# EAGLE board mainboard_v1 (EAGLE 9.4.2)
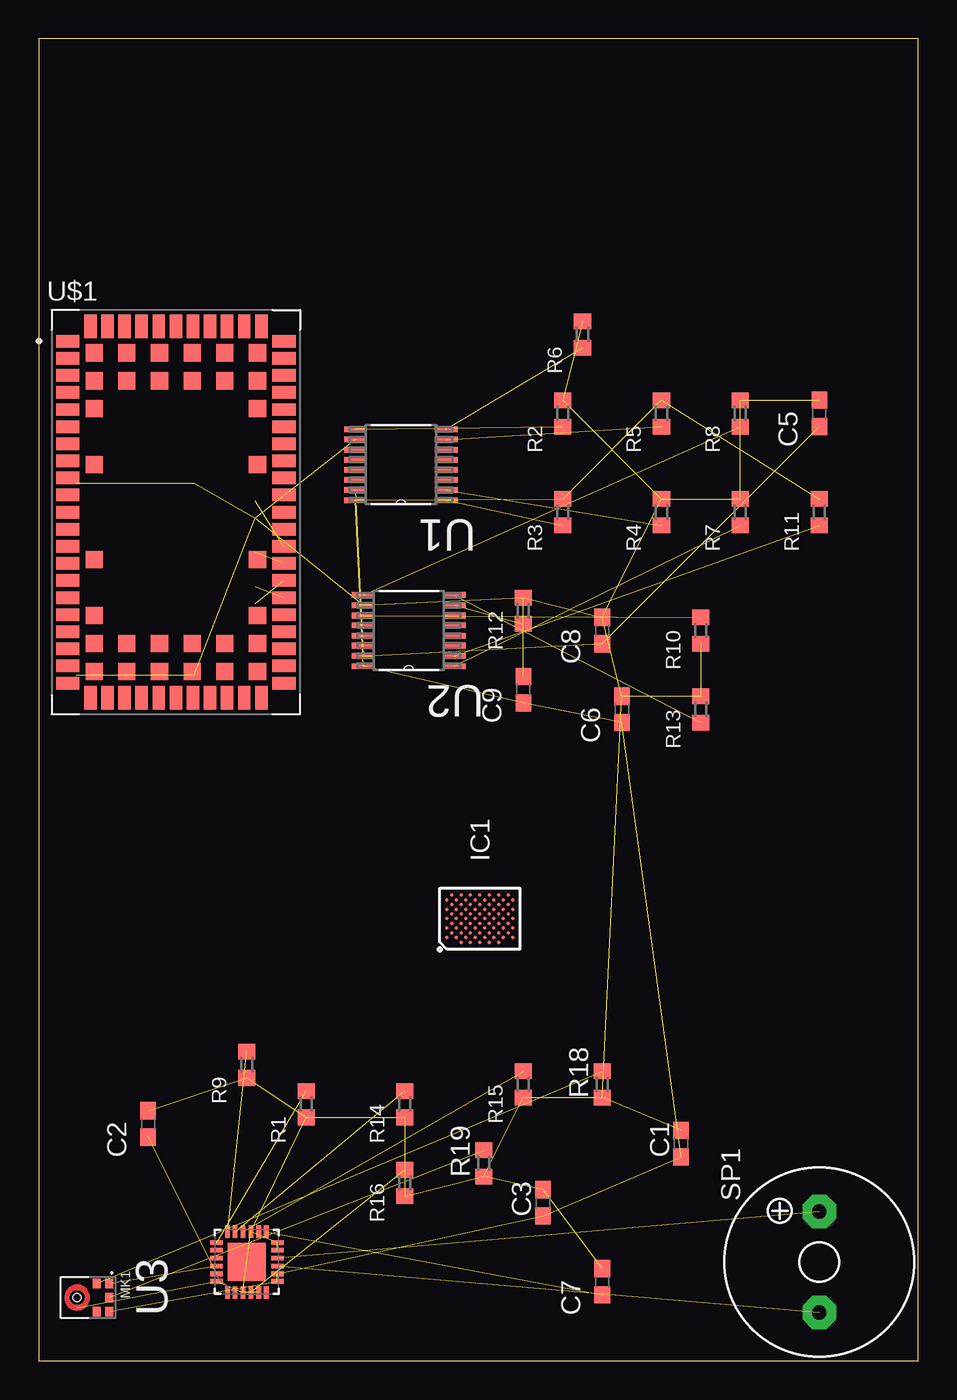
[diagram p0: board, top side]
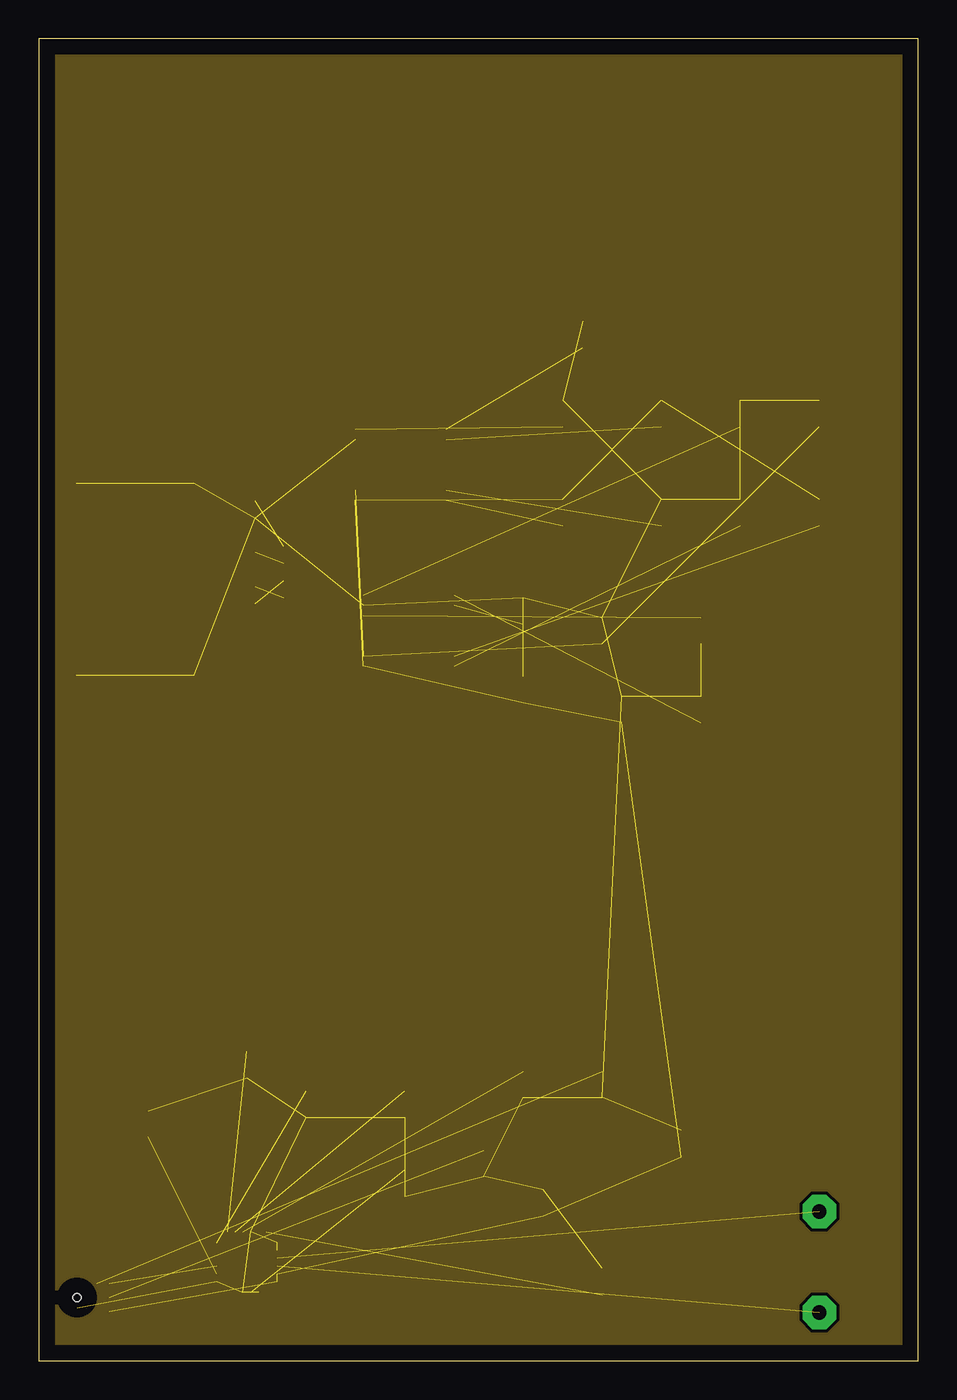
[diagram p1: board, inner layer Route2]
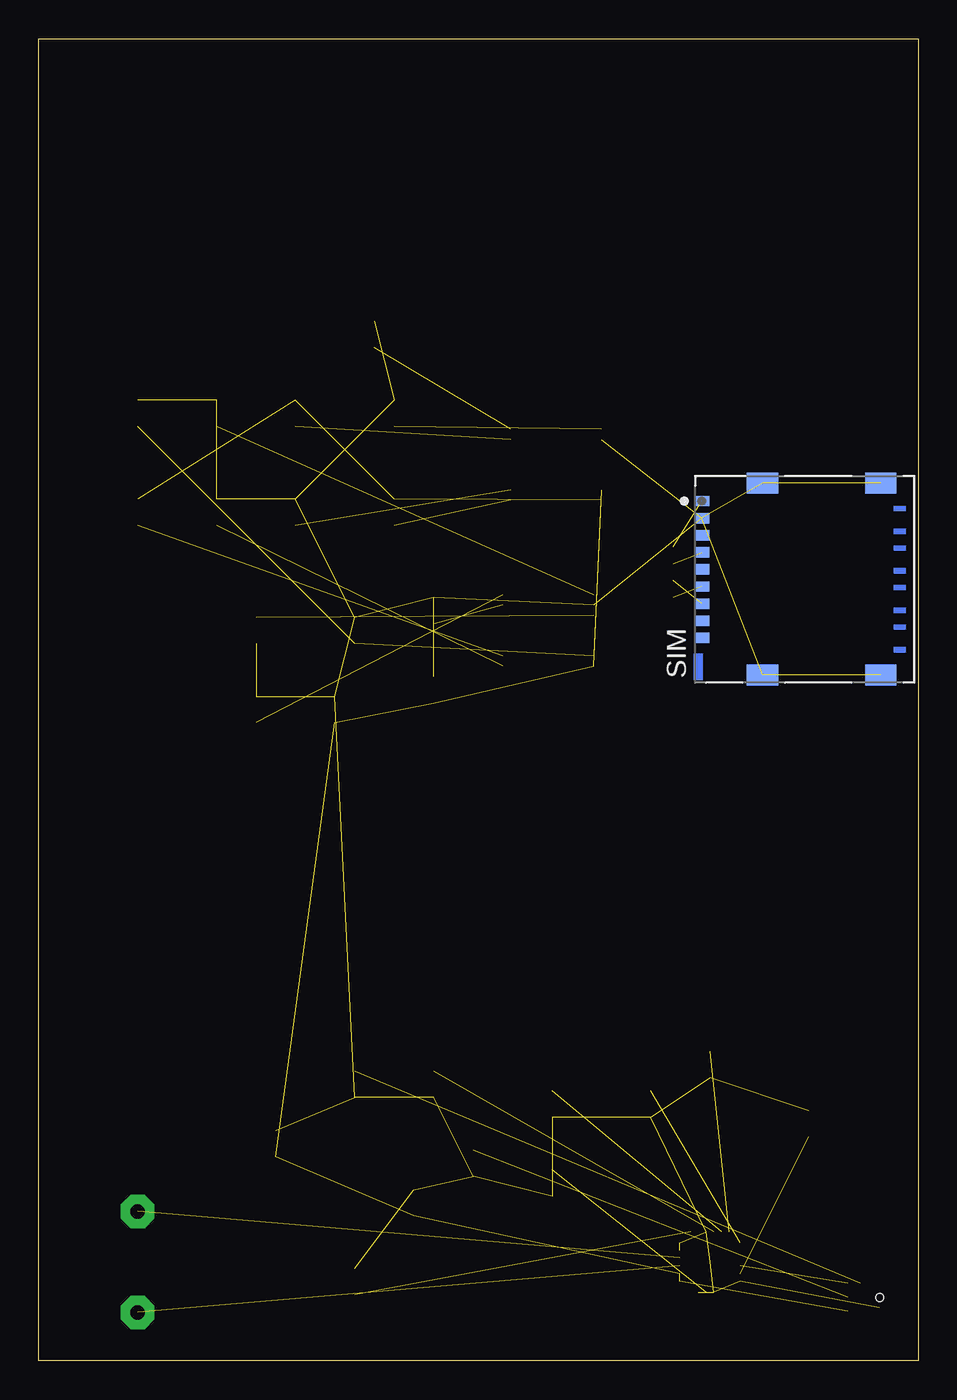
[diagram p2: board, bottom side, seen from below]

Size 56.57 x 85.07 mm. Coordinates in mm from the lower left corner, seen from the top.
Outline: 56.57,0 56.57,85.07 0,85.07 0,0 56.57,0
Copper layers (1+2*15+16): Top 0.035mm / dielectric 1.5mm / Route2 0.035mm / dielectric 0.15mm / Route15 0.035mm / dielectric 0.2mm / Bottom 0.035mm
Design rules "default *": minimum track width 6mil, minimum drill 0.35mm, track to track 6mil, track to pad 6mil, pad to pad 6mil, via to via 6mil, smd to smd 6mil, copper to edge 40mil, drill to drill 6mil, minimum pad ring 10mil, minimum via ring 8mil, stop-mask expansion 4mil, vias tented up to drill 0mil, thermal gap 10mil
Net classes: 0 default: width 0.203 mm, clearance 0.203 mm; 1 GND/voltage: width 0.457 mm, drill 0.152 mm, clearance 0.203 mm

## Footprints (pad centres in the part's own frame; a part is rotated, then mirrored left to right if it is on the bottom)
C0603 = smd 1.1 x 1: 1 -0.85,0; 2 0.85,0
BGA80C30P11X15_368X319X47 = smd 0.215 x 0.215: A2 -1.212,2.121; A4 -0.606,2.121; A6 0,2.121; A8 0.606,2.121; A10 1.212,2.121; B3 -0.909,1.818; B5 -0.303,1.818; B7 0.303,1.818; B9 0.909,1.818; B11 1.515,1.818; C2 -1.212,1.515; C4 -0.606,1.515; C6 0,1.515; C8 0.606,1.515; C10 1.212,1.515; D1 -1.515,1.212; D3 -0.909,1.212; D5 -0.303,1.212; D7 0.303,1.212; D9 0.909,1.212; D11 1.515,1.212; E2 -1.212,0.909; E4 -0.606,0.909; E6 0,0.909; E8 0.606,0.909; E10 1.212,0.909; F1 -1.515,0.606; F3 -0.909,0.606; F5 -0.303,0.606; F7 0.303,0.606; F9 0.909,0.606; F11 1.515,0.606; G2 -1.212,0.303; G4 -0.606,0.303; G6 0,0.303; G8 0.606,0.303; G10 1.212,0.303; H1 -1.515,0; H3 -0.909,0; H5 -0.303,0; H7 0.303,0; H9 0.909,0; H11 1.515,0; J2 -1.212,-0.303; J4 -0.606,-0.303; J6 0,-0.303; J8 0.606,-0.303; J10 1.212,-0.303; K1 -1.515,-0.606; K3 -0.909,-0.606; K5 -0.303,-0.606; K7 0.303,-0.606; K9 0.909,-0.606; K11 1.515,-0.606; L2 -1.212,-0.909; L4 -0.606,-0.909; L6 0,-0.909; L8 0.606,-0.909; L10 1.212,-0.909; M1 -1.515,-1.212; M3 -0.909,-1.212; M5 -0.303,-1.212; M7 0.303,-1.212; M9 0.909,-1.212; M11 1.515,-1.212; N2 -1.212,-1.515; N4 -0.606,-1.515; N6 0,-1.515; N8 0.606,-1.515; N10 1.212,-1.515; P3 -0.909,-1.818; P5 -0.303,-1.818; P7 0.303,-1.818; P9 0.909,-1.818; P11 1.515,-1.818; R2 -1.212,-2.121; R4 -0.606,-2.121; R6 0,-2.121; R8 0.606,-2.121; R10 1.212,-2.121
MIC_SPH0645LM4H-B = smd 0.6 x 0.522: 1 -0.9,2.074; 2 -0.9,1.252; 4 0.9,1.252; 5 0.9,2.074; 6 0,2.074 | smd 0.1 x 0.1: 3 0.65,0.02 | hole 0.5: 0,0
R0603 = smd 1 x 1.1: 1 -0.85,0; 2 0.85,0
TE_2199337-5 = smd 0.67 x 0.95: C1 5.03,6.625; C2 1.73,6.625; C3 -0.47,6.625; C4 -2.67,6.625; C5 3.93,6.625; C6 0.63,6.625; C7 -1.57,6.625; C8 -3.77,6.625; SW 2.83,6.625 | smd 1.35 x 2: G1 -6.175,2.72; G2 6.175,2.72; G3 6.175,-4.9; G4 -6.175,-4.9
KSS1201 = drill 0.914 pad 2.159 octagon: + 3.251,0; - -3.251,0
SOP65P640X120-16N = smd 1.473 x 0.356: 1 -2.921,2.286; 2 -2.921,1.626; 3 -2.921,0.965; 4 -2.921,0.33; 5 -2.921,-0.33; 6 -2.921,-0.965; 7 -2.921,-1.626; 8 -2.921,-2.286; 9 2.921,-2.286; 10 2.921,-1.626; 11 2.921,-0.965; 12 2.921,-0.33; 13 2.921,0.33; 14 2.921,0.965; 15 2.921,1.626; 16 2.921,2.286
QFN50P260X260X100-25N = smd 0.813 x 0.305: 1 -1.956,1.245; 2 -1.956,0.762; 3 -1.956,0.254; 4 -1.956,-0.254; 5 -1.956,-0.762; 6 -1.956,-1.245; 13 1.956,-1.245; 14 1.956,-0.762; 15 1.956,-0.254; 16 1.956,0.254; 17 1.956,0.762; 18 1.956,1.245 | smd 0.305 x 0.813: 7 -1.245,-1.956; 8 -0.762,-1.956; 9 -0.254,-1.956; 10 0.254,-1.956; 11 0.762,-1.956; 12 1.245,-1.956; 19 1.245,1.956; 20 0.762,1.956; 21 0.254,1.956; 22 -0.254,1.956; 23 -0.762,1.956; 24 -1.245,1.956 | smd 2.438 x 2.438: 25 0,0
XCVR_SARA-N200-02B = smd 1.5 x 0.8: 1 -6.95,11; 2 -6.95,9.9; 3 -6.95,8.8; 4 -6.95,7.7; 5 -6.95,6.6; 6 -6.95,5.5; 7 -6.95,4.4; 8 -6.95,3.3; 9 -6.95,2.2; 10 -6.95,1.1; 11 -6.95,0; 12 -6.95,-1.1; 13 -6.95,-2.2; 14 -6.95,-3.3; 15 -6.95,-4.4; 16 -6.95,-5.5; 17 -6.95,-6.6; 18 -6.95,-7.7; 19 -6.95,-8.8; 20 -6.95,-9.9; 21 -6.95,-11; 33 6.95,-11; 34 6.95,-9.9; 35 6.95,-8.8; 36 6.95,-7.7; 37 6.95,-6.6; 38 6.95,-5.5; 39 6.95,-4.4; 40 6.95,-3.3; 41 6.95,-2.2; 42 6.95,-1.1; 43 6.95,0; 44 6.95,1.1; 45 6.95,2.2; 46 6.95,3.3; 47 6.95,4.4; 48 6.95,5.5; 49 6.95,6.6; 50 6.95,7.7; 51 6.95,8.8; 52 6.95,9.9; 53 6.95,11 | smd 0.8 x 1.5: 22 -5.5,-11.95; 23 -4.4,-11.95; 24 -3.3,-11.95; 25 -2.2,-11.95; 26 -1.1,-11.95; 27 0,-11.95; 28 1.1,-11.95; 29 2.2,-11.95; 30 3.3,-11.95; 31 4.4,-11.95; 32 5.5,-11.95; 54 5.5,11.95; 55 4.4,11.95; 56 3.3,11.95; 57 2.2,11.95; 58 1.1,11.95; 59 0,11.95; 60 -1.1,11.95; 61 -2.2,11.95; 62 -3.3,11.95; 63 -4.4,11.95; 64 -5.5,11.95 | smd 1.1 x 1.1: 65 -5.25,10.25; 66 -3.15,10.25; 67 -1.05,10.25; 68 1.05,10.25; 69 3.15,10.25; 70 5.25,10.25; 71 -5.25,8.45; 72 -3.15,8.45; 73 -1.05,8.45; 74 1.05,8.45; 75 3.15,8.45; 76 5.25,8.45; 77 -5.25,6.65; 78 5.25,6.65; 79 -5.25,3.05; 80 5.25,3.05; 81 -5.25,-3.05; 82 5.25,-3.05; 83 -5.25,-6.65; 84 5.25,-6.65; 85 -5.25,-8.45; 86 -3.15,-8.45; 87 -1.05,-8.45; 88 1.05,-8.45; 89 3.15,-8.45; 90 5.25,-8.45; 91 -5.25,-10.25; 92 -3.15,-10.25; 93 -1.05,-10.25; 94 1.05,-10.25; 95 3.15,-10.25; 96 5.25,-10.25

## Placement (x,y rotation side)
C1  200pF  [C0603]  41.33,13.97 90 top
C2  100nF  [C0603]  7.04,15.24 90 top
C3  .1uF  [C0603]  32.44,10.16 90 top
C5  0.01uF  [C0603]  50.22,60.96 90 top
C6  0.01uF  [C0603]  37.52,41.91 90 top
C7  100nF  [C0603]  36.25,5.08 90 top
C8  0.01uF  [C0603]  36.25,46.99 90 top
C9  0.01uF  [C0603]  31.17,43.18 90 top
IC1  CY8C6247FDI-D32T  [BGA80C30P11X15_368X319X47]  28.37,28.45 90 top
MK1  SPH0645LM4H-B  [MIC_SPH0645LM4H-B]  2.46,4.06 270 top
R1  1k  [R0603]  17.2,16.51 90 top
R2  1k  [R0603]  33.71,60.96 90 top
R3  1k  [R0603]  33.71,54.61 90 top
R4  1k  [R0603]  40.06,54.61 90 top
R5  1k  [R0603]  40.06,60.96 90 top
R6  1k  [R0603]  34.98,66.04 90 top
R7  1k  [R0603]  45.14,54.61 90 top
R8  1k  [R0603]  45.14,60.96 90 top
R9  1k  [R0603]  13.39,19.05 90 top
R10  1k  [R0603]  42.6,46.99 90 top
R11  1k  [R0603]  50.22,54.61 90 top
R12  1k  [R0603]  31.17,48.26 90 top
R13  1k  [R0603]  42.6,41.91 90 top
R14  1k  [R0603]  23.55,16.51 90 top
R15  1k  [R0603]  31.17,17.78 90 top
R16  1k  [R0603]  23.55,11.43 90 top
R18  1k  [R0603]  36.25,17.78 90 top
R19  100k  [R0603]  28.63,12.7 90 top
SIM  2199337-5  [TE_2199337-5]  7.29,50.29 90 bottom
SP1  KSS1201  [KSS1201]  50.22,6.35 90 top
U1  SN74AVC4T774PWR  [SOP65P640X120-16N]  23.29,57.66 180 top
U2  SN74AVC4T774PWR  [SOP65P640X120-16N]  23.8,46.99 180 top
U3  TFA9879HN/N1,118  [QFN50P260X260X100-25N]  13.39,6.35 90 top
U$1  SARA-U260  [XCVR_SARA-N200-02B]  8.81,54.61 0 top

## Library data of the parts
C1-C3 C5-C9 R1-R16 R18 R19 = adafruit
IC1 = SamacSys_Parts; DESCRIPTION: ARM Microcontrollers - MCU; HEIGHT: 0.467mm; MANUFACTURER_NAME: Cypress Semiconductor; MANUFACTURER_PART_NUMBER: CY8C6247FDI-D32T; MOUSER_PART_NUMBER: 727-CY8C6247FDI-D32T; MOUSER_PRICE-STOCK: https://www.mouser.com/Search/Refine.aspx?Keyword=727-CY8C6247FDI-D32T
MK1 = SPH0645LM4H-B; DESCRIPTION: Mic Mems Digital I2s Omni -26db; DIGI-KEY_PART_NUMBER: 423-1405-1-ND; DIGI-KEY_PURCHASE_URL: https://www.digikey.com/product-detail/en/knowles/SPH0645LM4H-B/423-1405-1-ND/5332432?utm_source=snapeda&utm_medium=aggregator&utm_campaign=symbol; MF: Knowles; MP: SPH0645LM4H-B; PACKAGE: SIP-7 Bourns
SIM = 2199337-5; CENTERLINE_PITCH: 2.54 mm[.1 in]; COMMENT: 2199337-5; DESCRIPTION: ASS'Y FOR MICRO SIM H1.18 8POS _EMBOSS_; DIGI-KEY_PART_NUMBER: A125065CT-ND; DIGI-KEY_PURCHASE_URL: https://www.digikey.com/product-detail/en/te-connectivity-amp-connectors/2199337-5/A125065CT-ND/6810766?utm_source=snapeda&utm_medium=aggregator&utm_campaign=symbol; EU_ROHS_COMPLIANCE: Compliant; MF: TE Connectivity; MP: 2199337-5; NUMBER_OF_POSITIONS: 8; PACKAGE: None; PRODUCT_TYPE: Connector; TE_PURCHASE_URL: https://www.te.com/usa-en/product-2199337-5.html?te_bu=Cor&te_type=disp&te_campaign=seda_glo_cor-seda-global-disp-prtnr-fy19-seda-model-bom-cta_sma-317_1&elqCampaignId=32493
SP1 = buzzer; OC_FARNELL: unknown; OC_NEWARK: unknown
U1 U2 = SN74AVC4T774PWR; DESCRIPTION: 4-Bit Dual-Supply Bus Transceiver With Configurable Voltage-Level Shifting and 3-State Outputs 16-TSSOP -40 to 85; DIGI-KEY_PART_NUMBER: 296-24739-1-ND; DIGI-KEY_PURCHASE_URL: https://www.digikey.com/product-detail/en/texas-instruments/SN74AVC4T774PWR/296-24739-1-ND/2092561?utm_source=snapeda&utm_medium=aggregator&utm_campaign=symbol; MF: Texas Instruments; MP: SN74AVC4T774PWR; PACKAGE: TSSOP-16 Texas Instruments
U3 = TFA9879HN_N1_118; AVAILABILITY: Unavailable; DESCRIPTION: Audio Amp Speaker 1-CH Mono 2.75W Class-D 24-Pin HVQFN EP T/R; MF: NXP USA; MP: TFA9879HN/N1,118; PACKAGE: HVQFN-24 NXP Semiconductors; PRICE: None
U$1 = XCVR_SARA-N200-02B

## Nets
1.8V: C2.1 U3.23
+3V3 [GND/voltage]: C1.1 C3.1 C6.1 C9.1 MK1.5 R3.2 R5.2 R11.2 U1.16 U2.16 U3.7 U3.8
ADSEL1: R15.2 U3.16
ADSEL2: R16.2 U3.4
ANT: U$1.56
AUDIO_CK: MK1.4
AUDIO_SCK: U3.21
AUDIO_SDI: MK1.6 R19.2
AUDIO_SDO: U3.20
AUDIO_WS: MK1.1 U3.22
CTS_A: U1.6
CTS_B: U1.11
DSR_A2: U2.5
DSR_B: U2.12
DTR_A: U2.4
DTR_B2: U2.13
GND [GND/voltage]: C1.2 C2.2 C3.2 C5.2 C6.2 C7.2 C8.2 C9.2 MK1.3 R1.1 R2.2 R4.2 R6.2 R7.2 R8.2 R9.1 R10.1 R12.2 R13.2 R14.1 R15.1 R16.1 R18.1 R19.1 SIM.C5 SIM.G1 SIM.G2 SIM.G3 SIM.G4 U1.10 U2.10 U3.3 U3.5 U3.11 U3.12 U3.15 U3.24 U3.25
LRCK2: R1.2 U3.19
N$1: R3.1 U1.1
N$2: R4.1 U1.2
N$3: R5.1 U1.7
N$5: MK1.2 R18.2
N$6: R6.1 U1.8
N$7: R7.1 U2.1
N$8: R11.1 U2.2
N$9: R12.1 U2.7
N$10: R8.1 U2.9
N$12: R13.1 U2.8
N$13: R10.2 U2.11
N$18: R2.1 U1.9
RTS_A: U1.5
RTS_B: U1.12
RXD_A: U1.4
RXD_B: U1.13
SCK2: R9.2 U3.18
SCL: U3.2
SDA: U3.1
SDI2: R14.2 U3.17
SIM_CLK: SIM.C3 U$1.38
SIM_DET_A: U2.3
SIM_DET_B: U2.14
SIM_IO: SIM.C7 U$1.39
SIM_RST: SIM.C2 U$1.40
SP+: SP1.+ U3.10
SP-: SP1.- U3.9
STABA: C7.1 U3.13
TXD_A: U1.3
TXD_B: U1.14
V_INT: C5.1 C8.1 U1.15 U2.15
VSIM: SIM.C1 U$1.41

## Tracks (layer width: path | path; a pad name or v marks a point on that pad's centre or on a via)
1.8V  (1 unrouted)
+3V3  (11 unrouted)
ADSEL1  (1 unrouted)
ADSEL2  (1 unrouted)
AUDIO_SDI  (1 unrouted)
AUDIO_WS  (1 unrouted)
GND  (37 unrouted)
  pour Route2: 0.94,84.58 55.55,84.58 55.55,0.76 0.94,0.76
LRCK2  (1 unrouted)
N$1  (1 unrouted)
N$2  (1 unrouted)
N$3  (1 unrouted)
N$5  (1 unrouted)
N$6  (1 unrouted)
N$7  (1 unrouted)
N$8  (1 unrouted)
N$9  (1 unrouted)
N$10  (1 unrouted)
N$12  (1 unrouted)
N$13  (1 unrouted)
N$18  (1 unrouted)
SCK2  (1 unrouted)
SDI2  (1 unrouted)
SIM_CLK  (1 unrouted)
SIM_IO  (1 unrouted)
SIM_RST  (1 unrouted)
SP+  (1 unrouted)
SP-  (1 unrouted)
STABA  (1 unrouted)
V_INT  (3 unrouted)
VSIM  (1 unrouted)